# Altium PCB shkb_pro3_lite.PcbDoc
Units mm, origin at the board's own origin, x right, y up, seen from the top; angles counter-clockwise.
Board outline 213.5 x 65.05 mm, 2 copper layers (Top Layer, Bottom Layer), stack 2.07 mm thick; 37 components, 39 nets, 191 pads, 226 vias.
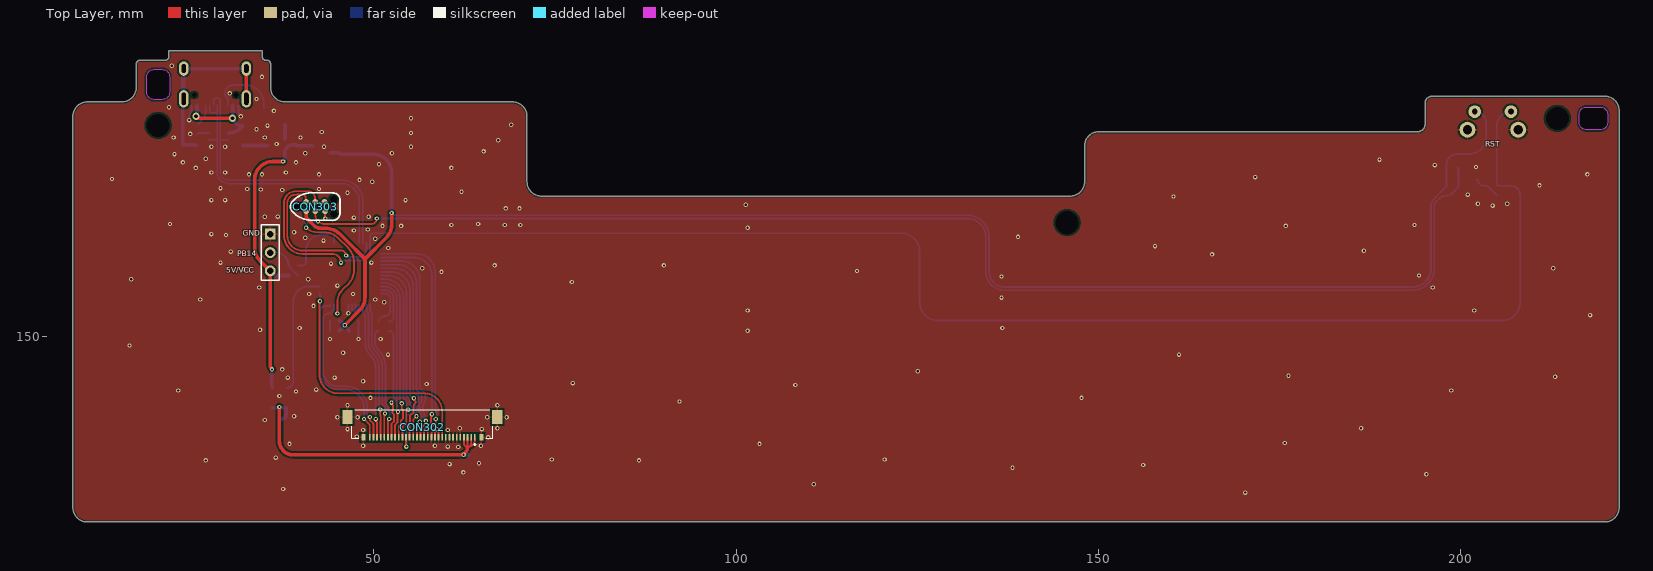
[diagram p0: Top Layer view]
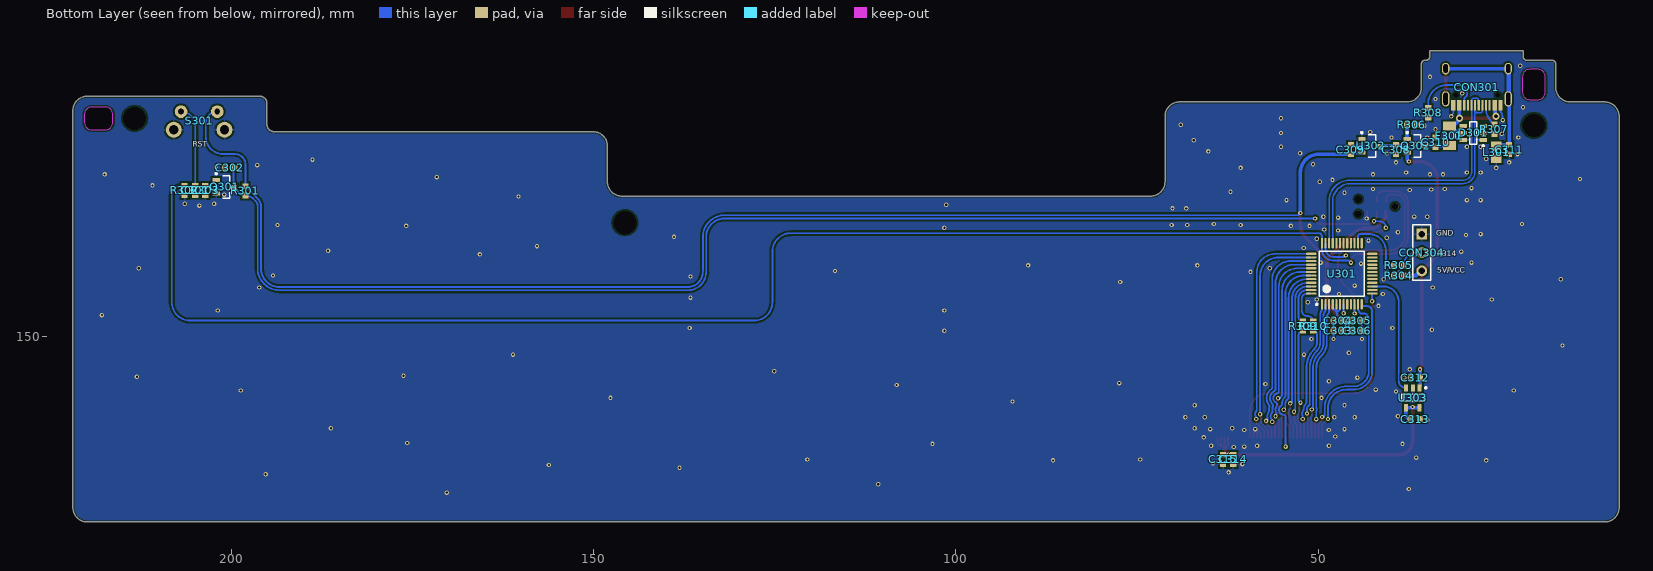
[diagram p1: Bottom Layer view, seen from below]

## Layer stack, top to bottom
Top Solder: solder mask 0.0102, Solder Resist, Dk 3.5
Top Layer: signal copper 0.0356
Dielectric 1: core 1.9986, Core-043, Dk 4.3
Bottom Layer: signal copper 0.0356
Bottom Solder: solder mask 0.0102, Solder Resist, Dk 3.5

## Board outline
8.438,126.339 8.438,180.339 cw(c10.438,180.339) 10.438,182.339 15.188,182.339 ccw(c15.188,184.339) 17.188,184.339 17.188,187.589 cw(c17.688,187.589) 17.688,188.089 21.188,188.089 ccw(c21.188,188.589) 21.688,188.589 21.688,189.389 34.588,189.389 34.588,188.589 ccw(c35.088,188.589) 35.088,188.089 35.238,188.089 cw(c35.238,187.589) 35.738,187.589 35.738,184.339 ccw(c37.738,184.339) 37.738,182.339 69.138,182.339 cw(c69.138,180.339) 71.138,180.339 71.138,171.339 ccw(c73.138,171.339) 73.138,169.339 146.138,169.339 ccw(c146.138,171.339) 148.138,171.339 148.138,176.239 cw(c150.138,176.239) 150.138,178.239 194.138,178.239 ccw(c194.138,179.239) 195.138,179.239 195.138,182.139 cw(c196.138,182.139) 196.138,183.139 219.938,183.139 cw(c219.938,181.139) 221.938,181.139 221.938,126.339 cw(c219.938,126.339) 219.938,124.339 10.438,124.339 cw(c10.438,126.339)
cut-out: 216.438,179.489 216.438,180.639 cw(c217.438,180.639) 217.438,181.639 219.338,181.639 cw(c219.338,180.639) 220.338,180.639 220.338,179.489 cw(c219.338,179.489) 219.338,178.489 217.438,178.489 cw(c217.438,179.489)
cut-out: 19.638,182.671 cw(c19.638,183.671) 18.638,183.671 18.638,185.821 cw(c19.638,185.821) 19.638,186.821 20.788,186.821 cw(c20.788,185.821) 21.788,185.821 21.788,183.671 cw(c20.788,183.671) 20.788,182.671

## Design rules (kind name [scope] priority, off if disabled: settings)
BoardOutlineClearance [All] p1: gap=0.254 ignorepadtopadclearanceinfootprint=FALSE except(0: Arc-SplitContinuation Track-SplitContinuation SMDPad-SplitContinuation THPad-SplitContinuation Via-SplitContinuation Fill-SplitContinuation Poly-SplitContinuation Region-SplitContinuation Text-SplitContinuation)
Clearance [All] p1: gap=0.254 ignorepadtopadclearanceinfootprint=FALSE except(0: Arc-Hole Track-Hole SMDPad-Hole THPad-Hole Via-Hole Fill-Hole Poly-Hole Region-Hole Text-Hole; 0.2: Arc-Arc Arc-Track Arc-SMDPad Track-Track Track-SMDPad SMDPad-SMDPad)
DiffPairsRouting [All] p1: maxlimit=0.254 minlimit=0.254 mostfreqgap=0.254 toplayer_minwidth=0.2 toplayer_maxwidth=0.381 toplayer_prefwidth=0.381 bottomlayer_minwidth=0.2 bottomlayer_maxwidth=0.381 bottomlayer_prefwidth=0.381 maxuncoupledlength=12.7
HoleSize [All] p1: absolutevalues=TRUE maxlimit=3.2 minlimit=0.025 maxpercent=80.000 minpercent=20.000
PlaneConnect [All] p1: pad.planeconnectstyle=Relief pad.reliefexpansion=0.508 pad.reliefentries=4 pad.reliefconductorwidth=0.254 pad.reliefairgap=0.254 via.planeconnectstyle=Direct via.reliefexpansion=0.508 via.reliefentries=4 via.reliefconductorwidth=0.254 via.reliefairgap=0.254
PolygonConnect [All] p1: connectstyle=Relief reliefconductorwidth=0.254 reliefentries=4 polygonreliefangle="90 Angle" airgapwidth=0.254
RoutingVias [All] p1: holewidth=0.711 width=1.27 viastyle="Through Hole" minholewidth=0.3 minwidth=0.6 maxholewidth=0.711 maxwidth=1.27
SolderMaskExpansion [All] p1: expansion=0.102 istentingtop=FALSE
Width [All] p1: maxlimit=0.5 minlimit=0.2 preferedwidth=0.254
27 further rules are at their usual default settings.

## Classes and differential pairs
differential pair D: +D_P -D_N

## Components (designator, comment, footprint, x,y, rotation, side; value= is the part's Value field where it differs from the comment)
C301 "" C0603[1608] 205.048,170.114 r270 bottom value=4.7uF
C302 "" C0603[1608] 200.279,173.228 r0 bottom value=470nF
C303 "" C0603[1608] 47.244,150.749 r180 bottom value=1uF
C304 "" C0603[1608] 47.244,152.146 r180 bottom value=0.1uF
C305 "" C0603[1608] 44.577,152.146 r0 bottom value=0.1uF
C306 "" C0603[1608] 44.577,150.749 r0 bottom value=4.7uF
C308 "" C0603[1608] 39.243,175.768 r90 bottom value=1uF
C309 "" C0603[1608] 45.466,175.768 r270 bottom value=1uF
C310 "" C0603[1608] 33.782,176.784 r270 bottom value=4.7uF
C311 "" C0603[1608] 23.622,175.768 r90 bottom value=0.1uF
C312 "" C0603[1608] 36.561,144.272 r180 bottom value=1uF
C313 "" C0603[1608] 36.576,138.557 r0 bottom value=1uF
C314 "" C0603[1608] 61.722,132.969 r270 bottom value=4.7uF
C315 "" C0603[1608] 63.119,132.969 r90 bottom value=0.1uF
CON301 "TYPE-C-31-M-12" TYPE-C-31-M-12 28.069,181.849 r0 bottom
CON302 "20455-030E-76" IPEX_20455-030E-76 56.686,137.937 r180 top locked
CON303 "TC2030-IDC" TC2030-IDC-NL 41.91,167.894 r0 top
CON304 "Header 3" HDR1X3 35.687,164.084 r270 bottom
D301 "SRV05" SOT-23-6 28.575,178.054 r180 bottom
F301 "Fuse Thermal" C1206[3216] 31.877,177.673 r90 bottom
L301 "Inductor" L0805 25.4,175.387 r90 bottom
Q301 "2N7002 NMOS" SOT-23-3 200.943,170.622 r0 bottom
Q302 "PMOS-2" SOT-23-3 36.506,176.276 r0 bottom
R301 "Res1" R0603[1608] 198.12,170.053 r270 bottom value=10K
R302 "Res1" R0603[1608] 206.502,170.114 r270 bottom value=10K
R303 "Res1" R0603[1608] 203.651,170.114 r270 bottom value=100K
R304 "Res1" R0603[1608] 38.862,158.369 r0 bottom value=10K
R305 "Res1" R0603[1608] 38.862,159.766 r0 bottom value=470
R306 "Res1" R0603[1608] 37.084,179.197 r180 bottom value=10K
R307 "Res1" R0603[1608] 25.654,178.562 r270 bottom value=5k1
R308 "Res1" R0603[1608] 34.798,180.848 r270 bottom value=5k1
R309 "Res1" R0603[1608] 52.07,151.384 r90 bottom value=470
R310 "Res1" R0603[1608] 50.673,151.384 r90 bottom value=470
S301 "SW-PB" TC-1101V-B-A-W 204.5,181 r180 bottom locked
U301 "STM32G0B1" "STM32 - LQFP48, 7x7mm" 46.728,158.619 r180 bottom locked
U302 "XC6206P332MR" SOT-23-3 42.758,176.276 r0 bottom
U303 "DS8601-33S5" SOT-23-5 36.928,141.478 r0 bottom

## Footprints (in the part's own frame and the unit in brackets; to place one, negate y for a bottom-side part, rotate by r counter-clockwise, add the part's x,y. Pads: shape width x height; smd on the part's side, far side on the other; paste and mask are expansions set on the pad)
C0603[1608] [mm] "Chip Resistor, 2-Leads, Body 1,57x0,80mm, IPC Medium Density"
  rect 0.8x0.85 smd: 1(-0.65,0) 2(0.65,0)
  body extent -0.83,-0.43 0.82,0.43, height 0.5
C1206[3216] [mm]
  rect 1.2x1.8 smd: 1(-1.35,0) 2(1.35,0)
  silkscreen extent -0.35,-0.8 0.35,0.8, body extent -1.6,-0.9 1.6,0.9, height 1.2
HDR1X3 [mm] "Connector; Header; 3 Position"
  rect 1.5x1.5 hole 0.9: 1(0,0)
  round 1.5 hole 0.9: 2(2.54,0) 3(5.08,0)
  silkscreen extent -1.27,-1.27 6.35,1.27
IPEX_20455-030E-76 [mm]
  rect 0.25x0.9 smd: 1(-7.25,1.92) 2(-6.75,1.92) 3(-6.25,1.92) 4(-5.75,1.92) 5(-5.25,1.92) 6(-4.75,1.92) 7(-4.25,1.92) 8(-3.75,1.92) 9(-3.25,1.92) 10(-2.75,1.92) 11(-2.25,1.92) 12(-1.75,1.92) 13(-1.25,1.92) 14(-0.75,1.92) 15(-0.25,1.92) 16(0.25,1.92) 17(0.75,1.92) 18(1.25,1.92) 19(1.75,1.92) 20(2.25,1.92) 21(2.75,1.92) 22(3.25,1.92) 23(3.75,1.92) 24(4.25,1.92) 25(4.75,1.92) 26(5.25,1.92) 27(5.75,1.92) 28(6.25,1.92) 29(6.75,1.92) 30(7.25,1.92)
  rect 0.55x0.9 smd: S1(-8.15,1.92) S3(8.15,1.92)
  rect 1.4x1.9 smd: S2(-10.35,-0.9) S4(10.35,-0.9)
  silkscreen extent -9.73,-1.9 9.73,3, body extent -10.57,-1.88 10.68,2.07, height 0.98
L0805 [mm] "based on Sunlord-GZ2012D101TF_C1015 datasheet"
  rect 1.16x1.47 smd: 1(-0.92,0) 2(0.92,0)
  body extent -1.15,-0.72 1.15,0.72, height 1.02
R0603[1608] [mm] "Chip Resistor, 2-Leads, Body 1,57x0,80mm, IPC Medium Density"
  rect 0.8x0.85 smd: 1(-0.65,0) 2(0.65,0)
  body extent -0.83,-0.43 0.82,0.43, height 0.5
SOT-23-3 [mm] "3.3v regulator, used in Windsond S2 proto 1"
  rect 1x0.55 smd: 1(1.2,-0.95) 2(1.2,0.95) 3(-1.2,0)
  silkscreen extent -0.7,-1.95 1.33,1.55, body extent -1.1,-1.5 1.45,1.5, height 1
SOT-23-5 [mm]
  rect 0.55x1 smd: 1(-0.95,-1.375) 2(0,-1.375) 3(0.95,-1.375) 4(0.95,1.375) 5(-0.95,1.375)
  silkscreen extent -1.92,-1.5 1.55,0.46, body extent -1.5,-1.6 1.5,1.6, height 0.92
SOT-23-6 [mm]
  rect 1x0.55 smd: 1(1.375,-0.95) 2(1.375,0) 3(1.375,0.95) 4(-1.375,0.95) 5(-1.375,0) 6(-1.375,-0.95)
  silkscreen extent -0.46,-1.92 1.5,1.55, body extent -1.47,-1.49 1.37,1.44, height 1.05
"STM32 - LQFP48, 7x7mm" [mm] "LQFP48, 7x7mm"
  oval 0.3x1.45 smd: 1(-2.75,-4.225) 2(-2.25,-4.225) 3(-1.75,-4.225) 4(-1.25,-4.225) 5(-0.75,-4.225) 6(-0.25,-4.225) 7(0.25,-4.225) 8(0.75,-4.225) 9(1.25,-4.225) 10(1.75,-4.225) 11(2.25,-4.225) 12(2.75,-4.225) 25(2.75,4.225) 26(2.25,4.225) 27(1.75,4.225) 28(1.25,4.225) 29(0.75,4.225) 30(0.25,4.225) 31(-0.25,4.225) 32(-0.75,4.225) 33(-1.25,4.225) 34(-1.75,4.225) 35(-2.25,4.225) 36(-2.75,4.225)
  oval 1.45x0.3 smd: 13(4.225,-2.75) 14(4.225,-2.25) 15(4.225,-1.75) 16(4.225,-1.25) 17(4.225,-0.75) 18(4.225,-0.25) 19(4.225,0.25) 20(4.225,0.75) 21(4.225,1.25) 22(4.225,1.75) 23(4.225,2.25) 24(4.225,2.75) 37(-4.225,2.75) 38(-4.225,2.25) 39(-4.225,1.75) 40(-4.225,1.25) 41(-4.225,0.75) 42(-4.225,0.25) 43(-4.225,-0.25) 44(-4.225,-0.75) 45(-4.225,-1.25) 46(-4.225,-1.75) 47(-4.225,-2.25) 48(-4.225,-2.75)
  silkscreen extent -3.58,-4.35 3.1,3.1, body extent -4.5,-4.5 4.5,4.5, height 1.6
TC2030-IDC-NL [mm] "Tag-Connect 6-Pin with No Legs (PN# TC2030-IDC-NL)"
  round 0.9 hole 0.995 unplated: 0(-2.54,0) 0(2.54,-1.016) 0(2.54,1.016)
  round 0.79 smd paste-0.39: 1(-1.27,-0.635) 2(-1.27,0.635) 3(0,-0.635) 4(0,0.635) 5(1.35,-0.635) 6(1.27,0.635)
  silkscreen extent -3.43,-1.91 3.43,1.9
TC-1101V-B-A-W [mm]
  round 1.75 hole 0.8: 1(-2.5,0) 2(2.5,0)
  round 2.2 hole 1.3: 3(-3.5,-2.5) 3(3.5,-2.5)
  body extent -4.24,-3.33 4.29,3.22, height 3.8
TYPE-C-31-M-12 [mm]
  rect 0.6x1.45 smd: A1B12(-3.25,0) A4B9(-2.45,0) B1A12(3.25,0) B4A9(2.45,0)
  rect 0.3x1.45 smd: A5(-1.25,0) A6(-0.25,0) A7(0.25,0) A8(1.25,0) B5(1.75,0) B6(0.75,0) B7(-0.75,0) B8(-1.75,0)
  oval 1x1.6 / inner oval 1x1.6 / far side oval 1.3x2 hole 0.6 slot 1.2 at 90 deg: S1(-4.32,-5.095) S1(4.32,-5.095)
  oval 1x2.1 / inner oval 1x2.1 / far side oval 1.3x2.4 hole 0.6 slot 1.7 at 90 deg: S1(-4.32,-0.915) S1(4.32,-0.915)
  round 0 hole 0.65 unplated: ""(-2.89,-1.445) ""(2.89,-1.445)
  body extent -4.48,-7.72 4.46,0.18, height 3.21

## Part data
C301 C306 C310 C314: library part Cap, "Capacitor", LCSC MFG="Samsung Electro-Mechanics", LCSC Part #=C19666, MRF.Part=CL10A475KO8NNNC, Version="0603 imperial"
C302: library part Cap, "Capacitor", LCSC MFG="Samsung Electro-Mechanics", LCSC Part #=C1623, MRF.Part=CL10B474KA8NNNC, Version="0603 imperial"
C303 C308 C309 C312 C313: library part Cap, "Capacitor", LCSC MFG="Samsung Electro-Mechanics", LCSC Part #=C15849, MRF.Part=CL10A105KB8NNNC, Version="0603 imperial"
C304 C305 C311 C315: library part Cap, "Capacitor", LCSC MFG=YAGEO, LCSC Part #=C14663, MRF.Part=CC0603KRX7R9BB104, Version="0603 imperial"
CON301: LCSC MFG="Korean Hroparts Elec", LCSC Part #=C165948, MRF.Part=TYPE-C-31-M-12
CON302: "Micro Coaxial Connector 0.5mm Pitch", LCSC MFG=I-PEX, LCSC Part #=C2890994, MRF.Part=20455-030E-76
CON303: library part "Header 3X2", "Header, 3-Pin, Dual row", Version=DNP
CON304: "Header, 3-Pin", Version=DNP
D301: LCSC MFG="ProTek Devices", LCSC Part #=C85364, MRF.Part=SRV05-4-P-T7
F301: "Thermal Fuse", LCSC MFG="Shenzhen JDT Fuse", LCSC Part #=C135338, MRF.Part=ASMD1206-050
L301: LCSC MFG=Sunlord, LCSC Part #=C1015, MRF.Part=GZ2012D101TF, Version="0806 imperial"
Q301: library part MOSFET-N, "N-Channel MOSFET", LCSC MFG="Changjiang Electronics Tech (CJ)", LCSC Part #=C8545, MRF.Part=2N7002
Q302: "P-Channel Power MOSFET", LCSC MFG="Vishay Intertech", LCSC Part #=C10487, MRF.Part=SI2301CDS-T1-GE3, Version=SOT23-3
R301 R302 R304 R306: "Resistor", LCSC MFG="Uniroyal Elec", LCSC Part #=C25804, MRF.Part=0603WAF1002T5E, Version="0603 imperial"
R303: "Resistor", LCSC MFG="Uniroyal Elec", LCSC Part #=C25803, MRF.Part=0603WAF1003T5E, Version="0603 imperial"
R305 R309 R310: "Resistor", LCSC MFG="UNI-ROYAL(Uniroyal Elec)", LCSC Part #=C23179, MRF.Part=0603WAF4700T5E, Version="0603 imperial"
R307 R308: "Resistor", LCSC MFG="Uniroyal Elec", LCSC Part #=C23186, MRF.Part=0603WAF5101T5E, Version="0603 imperial"
S301: "Switch", LCSC MFG="XKB Connection", LCSC Part #=C561498, MRF.Part=TC-1101V-B-A-W
U301: LCSC MFG=STMicroelectronics, LCSC Part #=STM32G0B1CBT6, MRF.Part=C2847904
U302: library part "SOT23 LDO", LCSC MFG="Torex Semicon", LCSC Part #=C5446, MRF.Part=XC6206P332MR
U303: LCSC MFG=DSTECH, LCSC Part #=C5795656, MRF.Part=DS8601-33S5

## Free pads (board coordinates)
  round 0 hole 3.2 unplated: ""(20.213,179.096) ""(145.713,165.664) ""(213.413,180.064)

## Via types
v1: diameter 0.6, hole 0.3, Top Layer to Bottom Layer, tented both sides, 224 vias
v2: diameter 1, hole 0.5, Top Layer to Bottom Layer, tented both sides, 2 vias

## Nets (pads, with @x,y where several pads share a name; then routed paths per layer and width w, separated by ;. In a path a pad name is that pad's centre, name@x,y a point inside that pad or via, vN(x,y) a via of type N, cw(c..) or ccw(c..) an arc to the next point about the centre after c; other vN are vias at no path point)
BOOT0: C301.1 CON303.4 R302.1 S301.1 U301.36 | length 228.1
  Top Layer w0.254: CON303.4 41.869,168.57 41.869,169.078 ccw(c40.948,169.078) 40.948,169.999 39.189,169.999 ccw(c39.189,168.402) 37.592,168.402 37.592,163.901 ccw(c40.132,163.901) 40.132,161.361 44.252,161.361 cw(c44.252,160.147) v1(45.466,160.147)
  Bottom Layer w0.254: v1(45.466,160.147) 45.774,160.455 47.981,160.455 ccw(c47.981,161.929) 49.455,161.929 49.455,162.234 49.478,162.257 U301.36 49.478,163.778 cw(c49.911,163.778) 49.911,164.211 122.809,164.211 cw(c122.809,161.671) 125.349,161.671 125.349,154.686 ccw(c127.889,154.686) 127.889,152.146 205.74,152.146 ccw(c205.74,154.686) 208.28,154.686 208.28,169.418 ccw(c206.934,169.418) 206.934,170.764 R302.1 C301.1 205.048,179.048 cw(c207,179.048) S301.1
COL_A: CON302.20 U301.43 | length 28.2
  Top Layer w0.254: CON302.20 54.436,134.794 v1(54.483,134.747)
  Bottom Layer w0.254: U301.43 51.981,158.369 cw(c51.981,155.829) 54.521,155.829 54.521,155.191 54.521,143.383 54.521,141.749 ccw(c54.775,141.75) 54.605,141.562 cw(c53.848,140.716) 54.983,140.716 54.983,140.616 ccw(c55.237,140.617) 55.1,140.403 cw(c54.737,139.827) 54.764,139.147 ccw(c54.775,138.893) 54.521,138.894 54.521,134.785 cw(c54.483,134.785) v1(54.483,134.747)
COL_B: CON302.16 U301.39 | length 29.5
  Top Layer w0.254: CON302.16 56.436,137.208 56.482,137.254 56.482,137.268 57.123,137.91 57.123,138.241 v1(57.185,138.303)
  Bottom Layer w0.254: U301.39 53.797,160.369 cw(c53.797,157.829) 56.337,157.829 56.337,142.929 ccw(c56.591,142.93) 56.442,142.724 cw(c55.517,141.432) 56.779,140.467 ccw(c56.982,140.314) 56.733,140.261 cw(c54.737,139.827) 56.777,139.726 ccw(c57.031,139.715) 56.82,139.574 cw(c55.88,138.938) 56.971,138.624 ccw(c57.215,138.555) v1(57.185,138.303)
COL_C: CON302.18 U301.41 | length 27.7
  Top Layer w0.254: CON302.18 55.436,138.494 v1(55.88,138.938)
  Bottom Layer w0.254: U301.41 52.889,159.369 cw(c52.889,156.829) 55.429,156.829 55.429,155.829 55.429,142.351 ccw(c55.683,142.352) 55.637,142.102 cw(c55.517,141.432) 55.798,140.812 ccw(c55.904,140.581) 55.69,140.444 cw(c54.737,139.827) 55.74,139.296 ; 55.739,139.295 ccw(c55.965,139.177) v1(55.88,138.938)
D_N: CON301.A7 CON301.B7 D301.1 U301.33 | length 40.1
  Bottom Layer w0.2: D301.1@27.261,177.043 D301.1 28.276,177.104 28.342,177.038 ; CON301.B7 27.369,181.799 27.369,181 27.545,180.824 28.093,180.824 28.269,181 ; CON301.A7 28.342,181.826 28.342,179.99 28.342,177.038 ; U301.33 47.997,162.863 47.997,163.509 48.001,163.513 48.001,168.595 ccw(c45.527,168.595) 47.589,169.962 ccw(c45.527,168.595) 46.894,170.657 ccw(c45.527,168.595) 45.527,171.069 29.988,171.069 cw(c29.988,172.715) 29.205,171.267 cw(c29.988,172.715) 28.54,171.932 cw(c29.988,172.715) 28.342,172.715 28.342,177.038
D_P: CON301.A6 CON301.B6 D301.6 U301.34 | length 41
  Bottom Layer w0.2: CON301.A6 27.869,181.899 27.869,182.698 28.045,182.874 28.593,182.874 28.769,182.698 28.769,182.474 28.819,182.424 CON301.B6 28.796,181.826 28.796,180.178 28.796,177.038 ; D301.6 28.862,177.104 28.796,177.038 ; U301.34 48.459,162.863 48.459,163.509 48.455,163.513 48.455,168.783 ccw(c45.715,168.783) 48.146,170.047 ccw(c45.715,168.783) 46.979,171.214 ccw(c45.715,168.783) 45.715,171.523 29.988,171.523 cw(c29.988,172.715) 29.475,171.639 cw(c29.988,172.715) 28.912,172.202 cw(c29.988,172.715) 28.796,172.715 28.796,177.038
DISCHARGE: CON302.29 U301.11 | length 23.7
  Top Layer w0.254: v1(49.451,138.827) 49.46,138.819 49.46,138.38 49.89,137.95 49.89,137.943 49.936,137.897 CON302.29
  Bottom Layer w0.254: 42.999,152.453 cw(c42.618,152.45) 42.999,152.45 42.999,152.4 ; U301.11 44.478,153.703 cw(c44.224,153.704) 44.469,153.638 cw(c44.224,153.704) 44.439,153.569 cw(c44.224,153.704) 44.424,153.548 ccw(c44.958,153.125) 44.302,153.307 cw(c44.057,153.376) 44.096,153.125 ccw(c44.096,152.028) 44.087,153.125 43.724,153.125 ccw(c43.724,152.4) 42.999,152.4 ; v1(49.451,138.827) 49.414,138.827 cw(c49.415,139.081) 49.206,138.938 ccw(c48.641,138.557) 49.156,139.003 cw(c49.349,139.168) 49.095,139.167 49.095,140.081 ccw(c46.101,140.081) 46.101,143.075 45.085,143.075 cw(c45.085,145.161) 42.999,145.161 42.999,152.4
GND: C302.2 C303.1 C304.1 C305.1 C306.1 C308.1 C309.1 C310.1 C311.1 C312.1 C313.1 C314.2 C315.1 CON301.A1B12 CON301.B1A12 CON302.5 CON302.6 CON302.7 CON302.8 CON302.9 CON302.11 CON302.12 CON302.13 CON302.S1 CON302.S2 CON302.S3 CON302.S4 CON303.5 CON304.1 D301.2 L301.1 Q301.2 R302.2 R303.2 R306.2 R307.2 R308.2 S301.3 U301.7 U302.1 U303.2 | length 15.7
  Top Layer w0.254: CON303.5@43.283,167.235 CON303.5 43.26,166.29 v1(43.307,166.243) ; CON302.13 57.936,136.422 cw(c58.674,136.422) v1(58.674,137.16) ; CON302.12 58.436,136.922 cw(c58.674,136.922) v1(58.674,137.16) ; CON302.11 58.936,136.898 ccw(c58.674,136.898) v1(58.674,137.16)
  Bottom Layer w0.254: v1(24.511,179.832) 24.557,179.878 24.557,180.304 ccw(c24.304,180.324) 24.558,180.333 cw(c25.438,180.366) 24.557,180.366 cw(c25.438,180.366) 24.761,180.93 ccw(c24.565,181.091) 24.819,181.09 CON301.A1B12 ; R307.2 25.796,178.054 D301.2 ; CON301.B1A12 31.319,181.074 ccw(c32.357,181.074) v1(31.623,180.34) ; C306.1 C305.1 ; U301.7 46.478,153.166 v1(46.482,153.162) ; v1(47.879,149.606) 47.894,149.621 C303.1 C304.1
  other v1: 170.307,128.397 37.465,128.905 110.744,129.54 195.326,130.937 62.357,131.191 138.176,131.826 156.21,132.207 60.452,132.334 64.516,132.461 26.797,132.842 86.614,132.842 74.549,132.969 120.523,132.969 36.449,133.223 61.649,134.691 60.198,134.747 48.514,134.874 58.42,134.874 64.77,134.874 38.354,135.128 103.251,135.128 175.768,135.255 65.786,136.017 47.625,136.144 48.514,137.033 60.198,137.033 46.355,137.16 64.897,137.16 61.849,137.287 67.056,137.287 186.309,137.287 34.925,138.43 44.958,138.811 47.752,138.811 65.659,138.811 68.326,138.811 38.989,138.938 46.355,140.462 67.056,140.462 92.202,140.97 49.53,141.478 147.701,141.478 36.957,141.732 39.243,142.367 22.987,142.494 198.755,142.494 42.037,142.621 108.204,143.256 57.277,143.383 77.47,143.51 48.514,143.764 38.1,144.272 44.577,144.272 213.106,144.399 176.276,144.526 125.095,145.161 37.338,145.415 51.943,147.447 161.163,147.447 45.755,147.702 16.256,148.717 43.942,149.606 50.927,149.606 101.6,150.749 34.29,150.876 39.751,151.13 136.779,151.13 217.932,152.908 101.6,153.543 201.93,153.543 41.656,154.178 51.435,154.686 26.035,155.067 50.2,155.068 136.652,155.321 41.056,155.83 47.117,155.829 34.163,156.718 196.215,156.718 44.958,156.972 77.343,157.48 16.51,157.861 40.929,157.862 136.652,158.242 194.31,158.369 59.344,158.878 116.713,159.004 32.004,159.258 56.677,159.386 212.852,159.385 66.675,159.766 90.043,159.766 44.069,160.02 28.829,160.147 49.657,160.147 165.735,161.29 30.226,161.671 186.69,161.798 51.978,162.18 157.861,162.433 43.053,163.195 50.2,163.45 40.513,163.576 138.938,163.703 29.591,163.957 27.559,164.084 38.989,164.338 47.244,164.592 49.149,164.719 101.6,164.973 51.181,165.227 53.756,165.228 175.895,165.227 60.706,165.354 68.072,165.354 70.231,165.354 193.675,165.354 21.844,165.481 64.389,165.481 47.244,166.37 34.925,166.497 36.738,166.498 49.276,166.497 68.199,167.64 70.104,167.64 204.47,168.021 101.346,168.148 202.438,168.275 206.502,168.275 27.559,168.783 29.464,168.783 54.356,168.783 160.401,169.291 201.041,169.545 46.355,169.799 62.103,169.926 37.338,170.18 34.378,170.257 32.512,170.307 42.418,170.307 28.829,170.434 210.947,170.815 49.784,171.323 48.006,171.577 13.843,171.704 171.704,171.958 32.766,172.339 34.544,172.339 42.418,172.339 217.551,172.339 27.559,172.593 29.464,172.593 37.846,172.593 25.4,173.228 60.706,173.228 202.184,173.355 196.469,173.609 50.708,173.737 23.622,173.99 39.243,173.99 188.849,174.371 26.797,174.498 22.479,175.133 40.513,175.26 52.486,175.261 65.151,175.514 27.559,176.149 29.464,176.149 43.11,176.153 55.118,176.149 36.576,176.53 67.183,177.038 22.352,177.419 34.925,177.419 39.878,177.419 24.638,177.927 55.118,178.054 42.799,178.181 33.782,178.562 35.306,179.07 68.961,179.197 55.118,180.086 36.195,181.102 21.717,181.61 33.782,182.753 30.099,183.515 34.544,185.801 22.098,187.325
LDO_ENABLE: U301.15 U303.3 | length 17.3
  Bottom Layer w0.254: U303.3 ccw(c37.878,143.837) 38.862,143.837 38.862,154.71 cw(c41.021,154.71) 38.898,155.103 cw(c41.021,154.71) 40.628,156.833 cw(c41.021,154.71) 41.021,156.869 U301.15
LED_1: R310.2 U301.48 | length 5.8
  Bottom Layer w0.254: R310.2 cw(c51.4,152.034) 51.4,152.761 51.469,152.761 ccw(c51.469,153.543) 52.251,153.543 52.251,155.192 ccw(c51.574,155.192) 51.574,155.869 U301.48
LED_2: R309.2 U301.47 | length 5.9
  Bottom Layer w0.254: U301.47 51.53,156.369 cw(c51.53,155.194) 52.705,155.194 52.705,152.669 cw(c52.07,152.669) R309.2
NetC301_2: C301.2 Q301.1 R303.1 | length 3.9
  Bottom Layer w0.254: Q301.1 202.368,171.572 202.516,171.424 202.516,171.199 202.951,170.764 R303.1 203.924,170.491 204.021,170.491 204.75,169.762 204.75,169.737 205.023,169.464 C301.2
NetC310_2: C310.2 F301.1 Q302.3 | length 3.4
  Bottom Layer w0.5: F301.1 35.034,176.323 35.081,176.276 Q302.3
NetC311_2: C311.2 CON301.S1 L301.2 | length 29.4
  Top Layer w0.5: CON301.S1@32.389,182.764 CON301.S1@32.389,186.944
  Bottom Layer w0.5: CON301.S1@23.749,182.764 CON301.S1@23.749,186.944 ; L301.2 ccw(c25.289,176.307) 25.289,176.418 C311.2 23.622,186.817 cw(c23.749,186.817) CON301.S1@23.749,186.944 ; CON301.S1@32.389,186.944 CON301.S1@23.749,186.944
NetCON301_A5: CON301.A5 R307.1 | length 3
  Bottom Layer w0.2: R307.1 26.075,179.633 ccw(c24.279,181.429) 26.819,181.429 CON301.A5
NetCON301_B5: CON301.B5 R308.1 | length 9.9
  Bottom Layer w0.254: CON301.B5 29.819,182.749 ccw(c29.565,182.747) 29.711,182.956 cw(c30.099,183.515) 29.418,183.515 cw(c30.561,183.515) 30.561,184.658 32.258,184.658 cw(c32.258,182.118) 34.798,182.118 R308.1
NetCON302_24: CON302.25 R310.1 | length 15.8
  Top Layer w0.254: CON302.25 51.936,138.282
  Bottom Layer w0.254: R310.1 ccw(c50.673,150.224) 50.515,150.709 ccw(c50.673,150.224) 50.163,150.227 ccw(c50.673,150.224) 50.163,150.224 50.163,149.081 ccw(c51.291,149.081) 50.494,148.283 cw(c47.774,145.564) 51.329,147.03 ; 51.088,147.514 cw(c47.774,145.564) 51.619,145.564 51.619,140.836 ccw(c51.873,140.837) 51.69,140.661 cw(c50.875,139.871) 52.01,139.889 ccw(c52.264,139.894) 52.063,139.739 cw(c51.527,139.319) 52.141,139.025 ccw(c52.371,138.917) 52.117,138.918 v1(52.117,138.557)
NetCON302_25: CON302.24 R309.1 | length 15.6
  Top Layer w0.254: v1(52.425,140.817) 52.491,140.751 52.491,140.549 52.639,140.401 52.639,139.947 52.578,139.886 52.578,139.352 52.798,139.132 52.798,138.275 52.436,137.913 CON302.24
  Bottom Layer w0.254: R309.1 cw(c52.07,150.099) 52.705,150.099 52.705,148.971 52.705,141.097 cw(c52.425,141.097) v1(52.425,140.817)
NetCON304_2: CON304.2 R304.2 R305.1 | length 5.5
  Bottom Layer w0.254: CON304.2 36.434,161.544 cw(c36.434,159.766) R305.1 38.485,159.493 38.485,159.396 39.214,158.667 39.239,158.667 39.512,158.394 R304.2
NetQ302_1: Q302.1 R306.1 | length 2
  Bottom Layer w0.5: Q302.1 37.709,177.226 37.734,177.251 R306.1
NRST: C302.1 CON303.3 Q301.3 R301.2 U301.10 | length 201.6
  Top Layer w0.254: v1(40.64,164.973) ccw(c42.181,166.514) 41.831,164.363 ccw(c42.181,166.514) 42.003,164.342 cw(c41.982,164.089) 42.018,164.34 ccw(c42.098,164.912) 42.098,164.335 43.22,164.335 cw(c43.22,161.795) 45.016,163.591 46.5,162.107 cw(c44.704,160.311) 46.518,162.088 cw(c44.704,160.311) 47.244,160.311 47.244,159.04 cw(c44.704,159.04) 46.5,157.244 45.702,156.446 ccw(c47.498,154.65) 45.166,155.656 ccw(c47.498,154.65) 44.958,154.65 v1(44.958,153.125) ; CON303.3 41.91,166.751 ccw(c43.136,166.751) v1@42.269,165.884 ; v1@42.269,165.884 v1(42.291,165.862) ccw(c43.192,166.763) 43.192,165.489 49.665,165.489 ccw(c49.665,166.243) v1(50.419,166.243)
  Bottom Layer w0.254: v1(40.64,164.973) cw(c41.529,164.973) 41.529,165.862 v1(42.291,165.862) ; v1(44.958,153.125) 44.978,153.145 U301.10 ; v1(50.419,166.243) 131.953,166.243 cw(c131.953,163.703) 134.493,163.703 134.493,158.877 ccw(c137.033,158.877) 137.033,156.337 193.421,156.337 ccw(c193.421,159.331) 196.415,159.331 196.415,167.945 cw(c197.408,167.945) 196.706,168.647 196.997,168.938 cw(c198.12,167.815) R301.2 ccw(c198.12,170.378) 198.744,169.629 ccw(c198.12,170.378) 198.809,169.689 Q301.3 199.743,173.114 C302.1
OPAMP_EN: CON302.27 U301.2 | length 19
  Top Layer w0.254: v1(50.875,139.871) cw(c50.723,139.718) 50.938,139.718 cw(c50.685,139.725) 50.914,139.615 ccw(c51.527,139.319) 50.914,139.023 cw(c50.684,138.914) 50.938,138.915 50.938,138.264 50.936,138.261 CON302.27
  Bottom Layer w0.254: U301.2 48.978,153.696 ccw(c49.838,153.696) 49.027,153.409 cw(c48.479,152.861) 49.216,153.101 cw(c48.479,152.861) 49.255,152.861 49.255,149.081 ccw(c51.291,149.081) 49.85,147.642 cw(c47.774,145.564) 50.127,147.322 cw(c47.774,145.564) 50.711,145.564 50.711,140.208 cw(c50.003,140.209) 50.695,140.058 ccw(c50.944,140.005) 50.694,140.052 v1(50.875,139.871)
PA1: CON302.30 U301.12 | length 23.7
  Top Layer w0.254: v1(48.641,138.557) 49.436,137.762 CON302.30
  Bottom Layer w0.254: U301.12 43.978,154.199 43.957,154.178 43.307,154.178 ccw(c43.307,153.416) 42.545,153.416 42.545,145.161 ccw(c45.085,145.161) 45.085,142.621 46.101,142.621 cw(c46.101,140.081) 48.641,140.081 v1(48.641,138.557)
PA2: CON302.10 U301.13 | length 34.7
  Top Layer w0.254: v1(42.545,154.813) ccw(c42.656,154.702) 42.499,154.702 42.499,144.653 ccw(c45.039,144.653) 45.039,142.113 49.241,142.113 ccw(c49.24,142.367) 49.318,142.125 cw(c49.53,141.478) 49.742,142.125 ccw(c49.82,142.367) 49.819,142.113 56.896,142.113 cw(c56.896,139.573) 59.436,139.573 CON302.10
  Bottom Layer w0.254: U301.13 42.524,155.869 42.545,155.848 v1(42.545,154.813)
PA15: CON302.14 U301.37 | length 32.6
  Top Layer w0.254: CON302.14 57.436,136.938 58.547,138.049 v1(58.547,138.557)
  Bottom Layer w0.254: U301.37 55.928,161.369 cw(c55.928,158.829) 58.468,158.829 58.468,139.833 ccw(c58.722,139.835) 58.528,139.67 cw(c58.014,139.224) 58.528,138.777 ccw(c58.72,138.612) v1@58.468,138.636 ; v1@58.468,138.636 ccw(c58.547,138.636) v1(58.547,138.557) ; v1@58.468,138.636 v1(58.547,138.557) ; v1@58.468,138.636 v1(58.547,138.557)
PB3: CON302.19 U301.42 | length 26.2
  Top Layer w0.254: CON302.19 54.936,138.149 54.982,138.195 54.982,139.003 55.499,139.52 55.499,140.521 55.745,140.767 55.745,140.978 55.583,141.14
  Bottom Layer w0.254: U301.42 52.435,158.869 cw(c52.435,156.329) 54.975,156.329 54.975,154.813 54.975,144.653 54.975,141.935 ccw(c55.229,141.936) 55.038,141.769 cw(c53.848,140.716) 55.195,141.559 ccw(c55.41,141.695) 55.366,141.445 ccw(c55.517,142.339) v1(55.517,141.432)
PB5: CON302.21 U301.44 | length 24.3
  Top Layer w0.254: CON302.21 53.936,137.487 54.468,138.018 v1@54.468,139.7
  Bottom Layer w0.254: U301.44 51.527,157.869 cw(c51.527,155.329) 54.067,155.329 54.067,155.194 cw(c53.613,155.194) 54.067,155.192 54.067,143.002 54.067,141.521 ccw(c54.321,141.523) 54.191,141.304 cw(c53.848,140.716) 54.529,140.716 54.529,140.035 ccw(c54.737,140.035) v1(54.737,139.827)
PB6: CON302.22 U301.45 | length 23.5
  Top Layer w0.254: CON302.22 53.436,137.629 53.706,137.899 53.706,138.288 54.014,138.596 54.014,139.836 53.848,140.002 v1(53.848,140.716)
  Bottom Layer w0.254: U301.45 51.438,157.369 cw(c51.438,155.194) 53.613,155.194 53.613,144.78 53.613,140.968 ccw(c53.867,140.969) v1(53.848,140.716)
PB7: CON302.23 U301.46 | length 22.6
  Top Layer w0.254: CON302.23 52.936,137.771 53.252,138.087 53.252,138.872 53.266,138.886 53.266,139.488 v1(53.333,139.554)
  Bottom Layer w0.254: U301.46 51.271,156.869 51.271,156.847 ccw(c51.29,157.1) 51.29,156.846 51.528,156.846 cw(c51.528,156.369) 51.678,156.822 ccw(c51.757,157.063) 51.725,156.811 cw(c51.53,155.194) 53.159,155.194 53.159,142.24 53.159,139.728 ccw(c53.333,139.728) v1(53.333,139.554)
PB14: R305.2 U301.26 | length 9.2
  Bottom Layer w0.254: R305.2 40.132,159.766 ccw(c40.132,160.274) 40.64,160.274 40.64,161.745 cw(c43.001,161.745) 43.001,164.106 44.174,164.106 cw(c44.174,163.802) 44.478,163.802 U301.26
PC13: CON302.26 U301.1 | length 19
  Top Layer w0.254: CON302.26 51.436,138.997 51.461,139.022 51.461,139.253 v1(51.527,139.319)
  Bottom Layer w0.254: U301.1 49.478,153.654 ccw(c49.732,153.655) 49.517,153.52 cw(c48.479,152.861) 49.709,152.861 49.709,149.081 ccw(c51.291,149.081) 50.172,147.962 cw(c47.774,145.564) 51.165,145.564 51.165,140.63 ccw(c51.419,140.631) 51.271,140.425 cw(c50.875,139.871) 51.544,139.743 ccw(c51.794,139.696) 51.54,139.706 v1(51.527,139.319)
PC15: CON302.28 U301.3 | length 18.7
  Top Layer w0.254: v1@50.172,138.31 50.436,138.046 CON302.28
  Bottom Layer w0.254: U301.3 48.478,153.426 ccw(c49.029,153.426) 48.639,153.037 cw(c48.25,152.647) 48.801,152.647 48.801,149.081 ccw(c51.291,149.081) 49.53,147.32 cw(c47.774,145.564) 50.257,145.564 50.257,140.208 cw(c50.003,140.209) 50.241,140.118 ccw(c50.875,139.871) 50.241,139.624 cw(c50.003,139.533) 50.257,139.534 v1(50.257,138.546)
PD0: CON302.15 U301.38 | length 31.3
  Top Layer w0.254: CON302.15 56.936,137.08 57.866,138.01 57.866,138.839 57.947,138.92 57.947,139.158 v1(58.014,139.224)
  Bottom Layer w0.254: U301.38 55.474,160.869 cw(c55.474,158.329) 58.014,158.329 v1(58.014,139.224)
PD2: CON302.17 U301.40 | length 28.5
  Top Layer w0.254: CON302.17 55.936,137.863 56.258,138.185 v1(56.339,138.185)
  Bottom Layer w0.254: U301.40 53.343,159.869 cw(c53.343,157.329) 55.883,157.329 55.883,142.674 ccw(c56.137,142.675) 56.023,142.448 cw(c55.517,141.432) 56.302,140.612 ccw(c56.479,140.43) 56.238,140.348 cw(c54.737,139.827) 56.311,139.609 ccw(c56.563,139.577) 56.376,139.404 cw(c55.88,138.938) 56.378,138.474 ccw(c56.565,138.302) v1(56.339,138.185)
RAW: CON301.A4B9 CON301.B4A9 D301.5 F301.2 | length 12.6
  Top Layer w0.5: v2(25.438,180.366) ccw(c25.718,180.366) 25.718,180.086 v2(30.48,180.086)
  Bottom Layer w0.5: v2(25.438,180.366) 25.438,180.501 25.569,180.632 25.569,181.799 CON301.A4B9 ; D301.5 ccw(c29.95,180.367) 31.585,178.731 F301.2 31.227,179.189 31.226,179.189 cw(c31.877,180.381) 30.869,179.471 cw(c31.241,179.805) 30.826,179.527 ccw(c30.45,179.279) 30.785,179.58 cw(c31.159,179.911) 30.742,179.636 cw(c31.877,180.381) 30.519,180.381 CON301.B4A9
SWDIO: CON303.2 U301.35 | length 22.6
  Top Layer w0.254: CON303.2 40.599,168.57 40.599,169.078 ccw(c40.132,169.078) 40.132,169.545 39.37,169.545 ccw(c39.37,167.513) 38.687,169.427 ccw(c38.774,169.188) 38.656,169.413 ccw(c39.189,168.402) 38.046,168.402 38.046,163.901 ccw(c40.132,163.901) 40.132,161.815 45.482,161.815 cw(c45.482,161.136) v1(46.161,161.136)
  Bottom Layer w0.254: v1(46.161,161.136) 46.255,161.136 46.482,160.909 47.793,160.909 ccw(c47.793,162.086) 48.969,162.086 48.969,162.835 U301.35
VCC3V3_MCU: C303.2 C304.2 C305.2 C306.2 C309.2 CON303.1 R301.1 S301.2 U301.4 U301.5 U301.6 U302.2 | length 233.6
  Top Layer w0.5: CON303.1 40.64,166.729 ccw(c41.507,166.729) 40.893,166.117 41.783,165.227 ccw(c42.544,165.988) 42.544,164.912 43.22,164.912 cw(c43.22,161.795) 45.423,164 cw(c43.22,161.795) 45.426,163.997 46.038,163.386 48.768,160.655 ; v1(45.974,151.511) 48.024,153.561 ccw(c46.228,155.357) 48.768,155.357 48.768,160.655 ; v1(52.451,167.005) 52.451,165.39 cw(c49.911,165.39) 51.707,163.594 48.768,160.655
  Bottom Layer w0.254: C304.2 46.594,152.171 46.867,152.444 46.892,152.444 47.371,152.923 47.371,153.289 ; U301.6 46.987,154.385 46.987,153.673 47.371,153.289 ; U301.5 47.478,153.396 ; U301.4 47.978,153.831 47.957,153.81 47.892,153.81 47.478,153.396 ; v1(52.451,167.005) 52.465,167.005 52.773,166.697 131.953,166.697 cw(c131.953,163.703) 134.947,163.703 134.947,159.004 ccw(c137.487,159.004) 135.279,157.748 135.28,157.746 ccw(c135.499,157.876) 135.285,157.738 ccw(c137.033,158.877) 137.033,156.791 193.421,156.791 ccw(c193.421,159.331) 195.961,159.331 195.961,167.945 cw(c197.408,167.945) 196.384,168.967 cw(c197.408,167.945) 196.386,168.969 196.674,169.257 cw(c198.12,167.815) 196.677,169.26 cw(c198.12,167.815) 196.72,169.302 ; 196.72,169.303 197.822,170.405 197.822,170.43 198.095,170.703 R301.1 198.12,173.736 cw(c199.517,173.736) 199.517,175.133 201.168,175.133 ccw(c201.168,177.546) 203.581,177.546 203.581,179.419 ccw(c202,179.419) S301.2 ; 47.371,153.289 47.478,153.396
  Bottom Layer w0.5: U302.2 C309.2@45.233,175.326 ; C306.2 45.227,150.774 45.377,150.924 45.402,150.924 45.974,151.496 v1(45.974,151.511) ; C305.2 45.227,152.121 45.377,151.971 45.514,151.971 v1(45.974,151.511) ; C309.2 49.911,175.118 cw(c49.911,172.578) 52.451,172.578 v1(52.451,167.005) ; C303.2 46.444,150.899 46.444,151.041 v1(45.974,151.511) ; C304.2 46.594,152.121 46.444,151.971 46.419,151.971 45.974,151.526 v1(45.974,151.511)
VCC5V: C308.2 C312.2 CON304.3 Q302.2 R304.1 U302.3 U303.1 | length 43.2
  Top Layer w0.5: v1(35.941,145.415) cw(c36.554,146.028) 35.687,146.028 CON304.3 34.272,160.419 cw(c36.068,162.215) 33.528,162.215 33.528,171.577 cw(c36.068,171.577) 36.068,174.117 v1(37.465,174.117)
  Bottom Layer w0.5: CON304.3 35.845,159.004 36.48,158.369 R304.1 ; v1(35.941,145.415) 35.941,145.388 35.911,145.358 C312.2 35.911,143.145 35.978,143.078 U303.1 ; 37.706,174.385 Q302.2 cw(c38.798,175.326) 38.798,176.418 C308.2 ; C308.2@39.243,176.276 U302.3
VCC_REG: C313.2 C314.1 C315.2 CON302.1 CON302.2 CON302.3 CON302.4 U303.4 U303.5 | length 43.6
  Top Layer w0.254: CON302.4 62.436,135.191 ccw(c62.936,135.191) 62.931,134.691 ; 62.936,134.691 ccw(c62.936,135.691) 63.936,135.691 CON302.1 ; 62.936,134.803 CON302.3 ; 62.992,134.747 ccw(c62.992,135.191) 63.436,135.191 CON302.2
  Top Layer w0.5: v1@36.957,139.954 36.957,135.509 ccw(c38.862,135.509) 38.862,133.604 61.844,133.604 ccw(c61.844,134.691) 62.931,134.691
  Bottom Layer w0.5: U303.5 U303.4 37.878,139.209 cw(c37.226,139.209) C313.2 ; C314.1 v1(62.396,133.619) C315.2
  other v1: 36.957,140.208
pads on no net: CON301. CON301.A8 CON301.B8 CON303.0 CON303.6 D301.3 D301.4 U301.8 U301.9 U301.14 U301.16 U301.17 U301.18 U301.19 U301.20 U301.21 U301.22 U301.23 U301.24 U301.25 U301.27 U301.28 U301.29 U301.30 U301.31 U301.32

## Polygon pours and split planes (outlines as drawn)
GND on Bottom Layer "Bottom Layer-GND" (solid, pour order 2): 8.438,126.339 8.438,180.339 cw(c10.438,180.339) 10.438,182.339 15.188,182.339 ccw(c15.188,184.339) 17.188,184.339 17.188,187.589 cw(c17.688,187.589) 17.688,188.089 21.188,188.089 ccw(c21.188,188.589) 21.688,188.589 21.688,189.389 34.588,189.389 34.588,188.589 ccw(c35.088,188.589) 35.088,188.089 35.238,188.089 cw(c35.238,187.589) 35.738,187.589 35.738,184.339 ccw(c37.738,184.339) 37.738,182.339 69.138,182.339 cw(c69.138,180.339) 71.138,180.339 71.138,171.339 ccw(c73.138,171.339) 73.138,169.339 146.138,169.339 ccw(c146.138,171.339) 148.138,171.339 148.138,176.239 cw(c150.138,176.239) 150.138,178.239 194.138,178.239 ccw(c194.138,179.239) 195.138,179.239 195.138,182.139 cw(c196.138,182.139) 196.138,183.139 219.938,183.139 cw(c219.938,181.139) 221.938,181.139 221.938,126.339 cw(c219.938,126.339) 219.938,124.339 10.438,124.339 cw(c10.438,126.339)
GND on Top Layer "Top Layer-GND" (solid, pour order 3): 8.438,126.339 8.438,180.339 cw(c10.438,180.339) 10.438,182.339 15.188,182.339 ccw(c15.188,184.339) 17.188,184.339 17.188,187.589 cw(c17.688,187.589) 17.688,188.089 21.188,188.089 ccw(c21.188,188.589) 21.688,188.589 21.688,189.389 34.588,189.389 34.588,188.589 ccw(c35.088,188.589) 35.088,188.089 35.238,188.089 cw(c35.238,187.589) 35.738,187.589 35.738,184.339 ccw(c37.738,184.339) 37.738,182.339 69.138,182.339 cw(c69.138,180.339) 71.138,180.339 71.138,171.339 ccw(c73.138,171.339) 73.138,169.339 146.138,169.339 ccw(c146.138,171.339) 148.138,171.339 148.138,176.239 cw(c150.138,176.239) 150.138,178.239 194.138,178.239 ccw(c194.138,179.239) 195.138,179.239 195.138,182.139 cw(c196.138,182.139) 196.138,183.139 219.938,183.139 cw(c219.938,181.139) 221.938,181.139 221.938,126.339 cw(c219.938,126.339) 219.938,124.339 10.438,124.339 cw(c10.438,126.339)

## Silkscreen, mask and mechanical layers (free items; w line width, h text height)
Top Overlay:
  lines w0.2: 34.417,157.734 34.417,165.354 36.957,165.354 36.957,157.734 34.417,157.734
  text "RST" at 203.454,176.149 h0.75
  text "GND" at 31.877,163.83 h0.75
  text "PB14" at 31.115,161.036 h0.75
  text "5V/VCC" at 29.591,158.75 h0.75
Bottom Overlay:
  lines w0.2: 36.957,157.734 34.417,157.734 34.417,165.354 36.957,165.354 ; 36.957,157.734 36.957,165.354 ; 36.957,157.734 36.957,165.354
  text "RST" at 205.359,176.149 h0.75
  text "GND" at 33.655,163.83 h0.75
  text "PB14" at 33.528,161.036 h0.75
  text "5V/VCC" at 33.528,158.75 h0.75
Top Solder:
  drawing of 2 lines, arcs and shapes, not listed
  text "SHKB Pro3" at 206.497,127.939 h3.3
  text "Rev A2" at 210.688,126.161 h2
Bottom Solder:
  drawing of 2 lines, arcs and shapes, not listed
  text "SHKB Pro3" at 24.607,128.113 h3.3
  text "Rev A2" at 20.416,126.335 h2
outline:
  drawing of 200 lines, arcs and shapes, not listed

## Text inside footprints (layer, text, board x,y; h text height)
CON301: Mechanical 15 "connector edge" at 25.119,189.099 h1 r180